# Altium PCB PCB1.PcbDoc
Units mm, origin at the board's own origin, x right, y up, seen from the top; angles counter-clockwise.
Board outline 32.85 x 43.15 mm, 2 copper layers (Top Layer, Bottom Layer); 20 components, 17 nets, 51 pads, 0 vias.
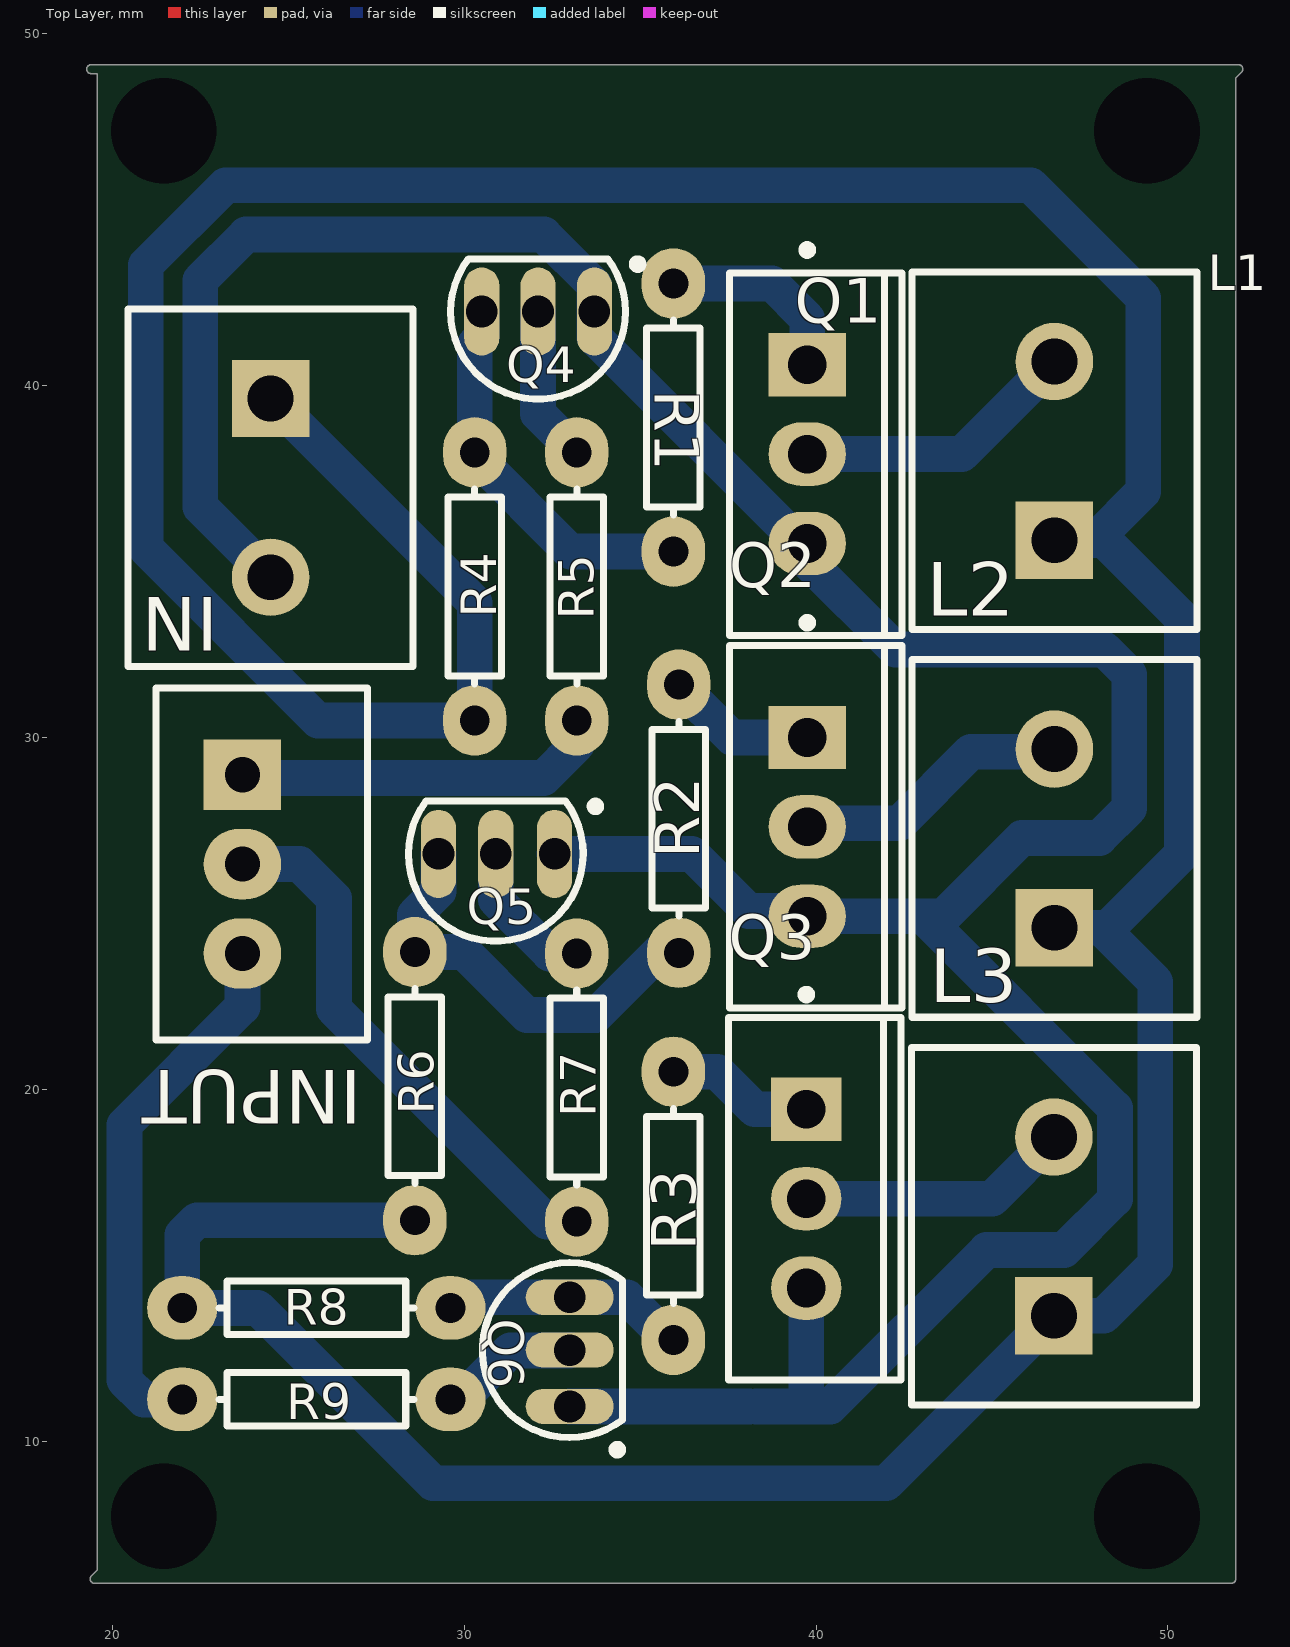
[diagram p0: Top Layer view]
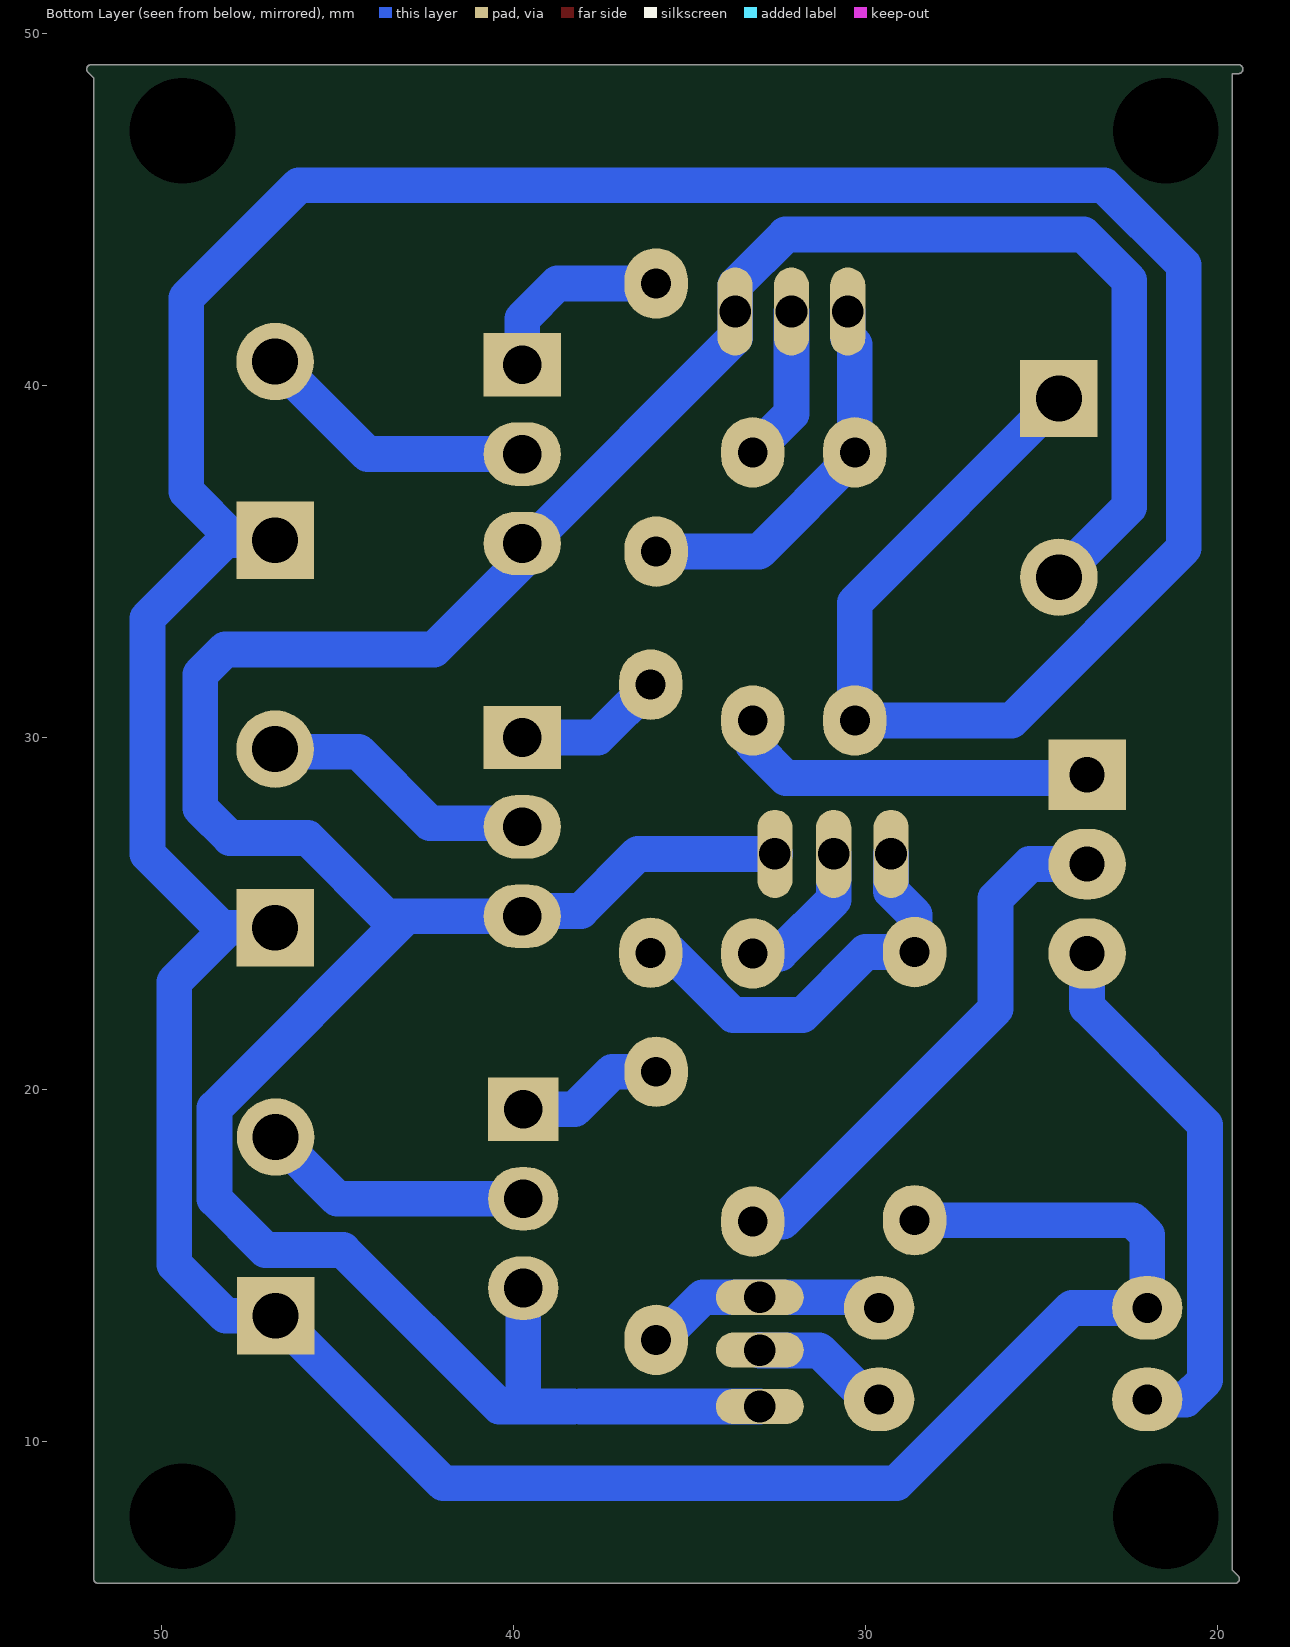
[diagram p1: Bottom Layer view, seen from below]

## Layer stack, top to bottom
Top Solder: solder mask 0.0102, Solder Resist, Dk 3.5
Top Layer: signal copper 0.0356
Dielectric 1: dielectric 0.32, FR-4, Dk 4.8
Bottom Layer: signal copper 0.0356
Bottom Solder: solder mask 0.0102, Solder Resist, Dk 3.5

## Board outline
19.41,6.191 ccw(c19.5,6.1) 19.5,5.973 51.8,5.973 ccw(c51.8,6.1) 51.927,6.1 51.927,48.747 52.09,48.91 ccw(c52,49) 52.127,49 ccw(c52,49) 52,49.127 19.4,49.127 ccw(c19.4,49) 19.4,48.873 19.573,48.873 19.573,6.353
cut-out: 142.367,57.912

## Design rules (kind name [scope] priority, off if disabled: settings)
Clearance Clearance_2 [All] p1: gap=0.127 ignorepadtopadclearanceinfootprint=FALSE
Clearance Clearance_1 [All] p2: gap=0.254 ignorepadtopadclearanceinfootprint=FALSE except(0: Arc-Hole Track-Hole SMDPad-Hole THPad-Hole Via-Hole Fill-Hole Poly-Hole Region-Hole Text-Hole)
Clearance [All] p3: gap=0.254 ignorepadtopadclearanceinfootprint=FALSE except(0: Arc-Hole Track-Hole SMDPad-Hole THPad-Hole Via-Hole Fill-Hole Poly-Hole Region-Hole Text-Hole)
DiffPairsRouting [All] p1: maxlimit=0.5 minlimit=0.35 mostfreqgap=0.35 toplayer_minwidth=0.381 toplayer_maxwidth=0.381 toplayer_prefwidth=0.381 bottomlayer_minwidth=0.381 bottomlayer_maxwidth=0.381 bottomlayer_prefwidth=0.381 maxuncoupledlength=12.7
PolygonConnect [All] p1: connectstyle=Relief reliefconductorwidth=0.254 reliefentries=4 polygonreliefangle="90 Angle" airgapwidth=0.254
RoutingVias [All] p1: holewidth=0.711 width=1.27 viastyle="Through Hole" minholewidth=0.711 minwidth=1.27 maxholewidth=0.711 maxwidth=1.27
SolderMaskExpansion [All] p1: expansion=0.102
Width [All] p1: maxlimit=1.27 minlimit=0.508 preferedwidth=1.016
29 further rules are at their usual default settings.

## Components (designator, comment, footprint, x,y, rotation, side; value= is the part's Value field where it differs from the comment)
IN "1729128" PHOE-1729128-2_V 24.5,37.1 r270 top
INPUT "Connector" "1x3x2.54 Pin Header TH V" 23.7,26.411 r270 top
L1 "" PHOE-1729128-2_V 46.773,38.151 r90 top
L2 "1729128" PHOE-1729128-2_V 46.773,27.138 r90 top
L3 "1729128" PHOE-1729128-2_V 46.758,16.115 r90 top
Q1 "TIP31C" ONSC-TO-220-3-221A-09#1 39.748,38.06 r0 top
Q2 "TIP31C" ONSC-TO-220-3-221A-09#1 39.748,27.469 r0 top
Q3 "TIP31C" ONSC-TO-220-3-221A-09#2 39.723,16.902 r0 top
Q4 "2N3904" TO-92A#1 32.1,42.111 r90 top
Q5 "2N3904" TO-92A#2 30.9,26.7 r90 top
Q6 "2N3904" TO-92A#3 33,12.6 r0 top
R1 "Res1" AXIAL-0.3 35.946,39.1 r90 top value=1K
R2 "Res1" AXIAL-0.3 36.1,27.7 r90 top value=1K
R3 "Res1" AXIAL-0.3 35.946,16.7 r90 top value=1K
R4 "Res1" AXIAL-0.3 30.3,34.3 r270 top value=1K
R5 "Res1" AXIAL-0.3 33.2,34.3 r90 top value=10K
R6 "Res1" AXIAL-0.3 28.6,20.1 r270 top value=1K
R7 "Res1" AXIAL-0.3 33.2,20.061 r90 top value=10K
R8 "Res1" AXIAL-0.3 25.8,13.8 r180 top value=1K
R9 "Res1" AXIAL-0.3 25.8,11.2 r0 top value=10K

## Footprints (in the part's own frame and the unit in brackets; to place one, negate y for a bottom-side part, rotate by r counter-clockwise, add the part's x,y. Pads: shape width x height; smd on the part's side, far side on the other; paste and mask are expansions set on the pad)
"1x3x2.54 Pin Header TH V" [mm] "1x3x2.54 Pin Header TH V"
  rect 2x2.2 hole 1: 1(-2.54,0)
  oval 2x2.2 hole 1: 2(0,0) 3(2.54,0)
  silkscreen extent -5,-2.45 5,3.55, body extent -3.81,-1.27 3.81,1.27, height 8.55
AXIAL-0.3 [mm] "Axial Device, Thru-Hole; 2 Leads; 0.3 in Pin Spacing"
  oval 2x1.8 hole 0.85: 1(-3.81,0) 2(3.81,0)
  silkscreen extent -2.77,-0.76 2.77,0.76
ONSC-TO-220-3-221A-09#1 [mm] "FM, 3-Leads, Body 10.3x4.85mm, Pitch 2.54mm"
  rect 2.2x1.8 hole 1.1: 1(0,2.54)
  oval 2.2x1.8 hole 1.1: 2(0,0) 3(0,-2.54)
  silkscreen extent -2.2,-5.15 2.69,5.92, body extent -2.18,-5.15 2.67,5.15, height 19.85
ONSC-TO-220-3-221A-09#2 [mm] "FM, 3-Leads, Body 10.3x4.85mm, Pitch 2.54mm"
  rect 2x1.8 hole 1.1: 1(0,2.54)
  oval 2x1.8 hole 1.1: 2(0,0) 3(0,-2.54)
  silkscreen extent -2.2,-5.15 2.69,5.92, body extent -2.18,-5.15 2.67,5.15, height 19.85
PHOE-1729128-2_V [mm] "Receptacle, 2-Leads, Body 8.1x10.16mm, Pitch 5.08mm"
  rect 2.2x2.2 hole 1.3: 1(-2.54,0)
  round 2.2 hole 1.3: 2(2.54,0)
  silkscreen extent -5.08,-4.05 5.08,4.05, body extent -5.65,-4.05 5.08,4.05, height 10.01
TO-92A#1 [mm] "TO, Flat Index; 3 In-Line, Axial Leads; Body Dia. 4.5mm; Leads 0.51 x 0.48 mm (max)"
  oval 2.5x1 hole 0.9: 1(0,-1.6) 2(0,0) 3(0,1.6)
  silkscreen extent -2.48,-2.96 1.5,2.48, body extent -2.48,-2.5 1.5,2.5, height 6.86
TO-92A#2 [mm] "TO, Flat Index; 3 In-Line, Axial Leads; Body Dia. 4.5mm; Leads 0.51 x 0.48 mm (max)"
  oval 2.5x1 hole 0.9: 1(0,-1.67) 2(0,0) 3(0,1.63)
  silkscreen extent -2.48,-2.96 1.5,2.48, body extent -2.48,-2.5 1.5,2.5, height 6.86
TO-92A#3 [mm] "TO, Flat Index; 3 In-Line, Axial Leads; Body Dia. 4.5mm; Leads 0.51 x 0.48 mm (max)"
  oval 2.5x1 hole 0.9: 1(0,-1.6) 2(0,0) 3(0,1.5)
  silkscreen extent -2.48,-2.95 1.5,2.48, body extent -2.48,-2.5 1.5,2.5, height 6.86

## Part data
IN L2 L3: library part CMP-2000-05815-1, "PCB Terminal Block, 13.5 A, 400 V, 2-Pin THD, RoHS, Bulk", Current Rating=13500mA, Manufacturer="Phoenix Contact", Package Description="2-Pin Through Hole Device, Body 8.1 x 10.16 mm, Pitch 5.08 mm", Package Reference=1729128-2, Package Version=03/2015, Voltage Rating=400V, Datasheet URL=https://datasheet.ciiva.com/16046/1729128-16046181.pdf, Datasheet Version=12/2013, Manufacturer URL=http://www.phoenixcontact.com/, Mounting Technology=ThroughHole, No. of Positions=2, No. of Rows=1, Orientation=Horizontal, Package URL=https://www.phoenixcontact.com/online/portal/pi/pxc/product_detail_page/!ut/p/b1/3VdJjqNKFDxLH8AFycySyWY2ozFsEPOMMQaDOX1XedGL_1Vdm5YXJleknhSKeBkvI6EA8ncAo3AYoDhBQGco6KN7VURTdemj9us_IEKEZo_YHiPAEWEFmDGOHMORkqKYCORBZxgL7ZoaZYcbFFUZ3fqxSY6GOuxydWUuHqz1ynmMFygu583Bob0Ewr6Sd_l-5m-kAueHiB0jpRwZwe58wwtkpxtMYd_LmGcDRU02dRNEyWt6Y2ti5pSyJ_reIkzIulrqApdnbT11V5jnCKbYNCvhEM1MCpPByat_X379-iThf08CI5GfOPqfBeS3BRoBOdD55AKVv0iLwCMq-2BrzXWSGRH7pUGD9uwXQjiph3xL0DKQwdGa0JImiIOmBNOestqgwTHSSs2oOep-78apyXQBvNi8ZLaFjvjWvcaUEBu0MC6Wbe-d6mB0FAebo2lUWinqYaZs5DAYzV0RP9yitUjnGJ0iI9xhZkT42OCQNUJJhkgWINNQLP2JFP6OpMg3JCVg70jqHT0lvKOnhHf0lPuOnnLf0VPuWx6_dxwUIvwk5WMkT0kLL1mh61l2yZVSzG3pYV_bqo-mj6uMKwKwdnnW8Jh5RTOJzMOA5c-eJDaZQw4mTMPH02PvS_ZAqNVjVTo2WyYLkwH_KU1mmmG5kjRhDqPXLwwVHvVOjCM60-fpXvTDfMGW1PVFVS1r4e4yVDk4ZdNbkUHvqPqQSeian4UD39fNKmachqdJ1NJbyk8rXT9mXTvPk3oE5meulKGgiruPJek-4I9hTT6G8ZLOyRSm2RRVbThERQad5OS28hdt4YW4vG0stgYYzsWsK4_7y6DZMjJSCqri1kyiZR5vD7pwIrNR7QwPHTcLTI5qT7eRlpHrdGiupYlqQDJ7zy_CND8fWWBoLRXxk1RVcXiBQwbTD4Xi7KL-FuO94t9xaqweXzH, Packing=Bulk, PartNumber=1729128, Pitch=5.08mm, RoHS=TRUE
INPUT: library part "Header 1x3"
L1: library part CMP-2000-05815-1, "PCB Terminal Block, 13.5 A, 400 V, 2-Pin THD, RoHS, Bulk", Current Rating=13500mA, Manufacturer="Phoenix Contact", Package Description="2-Pin Through Hole Device, Body 8.1 x 10.16 mm, Pitch 5.08 mm", Package Reference=1729128-2, Package Version=03/2015, PartNumber=1729128, Voltage Rating=400V, Datasheet URL=https://datasheet.ciiva.com/16046/1729128-16046181.pdf, Datasheet Version=12/2013, Manufacturer URL=http://www.phoenixcontact.com/, Mounting Technology=ThroughHole, No. of Positions=2, No. of Rows=1, Orientation=Horizontal, Package URL=https://www.phoenixcontact.com/online/portal/pi/pxc/product_detail_page/!ut/p/b1/3VdJjqNKFDxLH8AFycySyWY2ozFsEPOMMQaDOX1XedGL_1Vdm5YXJleknhSKeBkvI6EA8ncAo3AYoDhBQGco6KN7VURTdemj9us_IEKEZo_YHiPAEWEFmDGOHMORkqKYCORBZxgL7ZoaZYcbFFUZ3fqxSY6GOuxydWUuHqz1ynmMFygu583Bob0Ewr6Sd_l-5m-kAueHiB0jpRwZwe58wwtkpxtMYd_LmGcDRU02dRNEyWt6Y2ti5pSyJ_reIkzIulrqApdnbT11V5jnCKbYNCvhEM1MCpPByat_X379-iThf08CI5GfOPqfBeS3BRoBOdD55AKVv0iLwCMq-2BrzXWSGRH7pUGD9uwXQjiph3xL0DKQwdGa0JImiIOmBNOestqgwTHSSs2oOep-78apyXQBvNi8ZLaFjvjWvcaUEBu0MC6Wbe-d6mB0FAebo2lUWinqYaZs5DAYzV0RP9yitUjnGJ0iI9xhZkT42OCQNUJJhkgWINNQLP2JFP6OpMg3JCVg70jqHT0lvKOnhHf0lPuOnnLf0VPuWx6_dxwUIvwk5WMkT0kLL1mh61l2yZVSzG3pYV_bqo-mj6uMKwKwdnnW8Jh5RTOJzMOA5c-eJDaZQw4mTMPH02PvS_ZAqNVjVTo2WyYLkwH_KU1mmmG5kjRhDqPXLwwVHvVOjCM60-fpXvTDfMGW1PVFVS1r4e4yVDk4ZdNbkUHvqPqQSeian4UD39fNKmachqdJ1NJbyk8rXT9mXTvPk3oE5meulKGgiruPJek-4I9hTT6G8ZLOyRSm2RRVbThERQad5OS28hdt4YW4vG0stgYYzsWsK4_7y6DZMjJSCqri1kyiZR5vD7pwIrNR7QwPHTcLTI5qT7eRlpHrdGiupYlqQDJ7zy_CND8fWWBoLRXxk1RVcXiBQwbTD4Xi7KL-FuO94t9xaqweXzH, Packing=Bulk, Pitch=5.08mm, RoHS=TRUE
Q1 Q2 Q3: library part CMP-1048-00031-1, "Complementary Silicon Plastic Power Transistor, 3-Pin TO-220, Tube", Manufacturer="On Semiconductor", ComponentLink1Description="Manufacturer URL", ComponentLink1URL=http://www.onsemi.com/, ComponentLink2Description=Datasheet, ComponentLink2URL=http://www.onsemi.com/pub_link/Collateral/TIP31A-D.PDF, ComponentLink3Description="Package Specification", ComponentLink3URL=http://www.onsemi.com/pub_link/Collateral/221A-09.PDF, DatasheetVersion="Rev. 14", fT Min (MHz)=3, IC Continuous (A)=3, Mounting Technology="Through Hole", PackageDescription="3-Pin Flange Mount, Vertical Straight Lead, Body 9.97 x 4.445 mm, Pitch 2.54 mm", PackageReference=TO-220-3-221A-09, PackageVersion="Rev. AG, 09/2011", Packing=Tube, PartNumber=TIP31C, Polarity=NPN, RoHS=FALSE
Q4 Q5 Q6: "NPN General Purpose Amplifier", ComponentLink1Description="Manufacturer Link", ComponentLink1URL=http://www.fairchildsemi.com/, ComponentLink2Description=Datasheet, ComponentLink2URL=http://www.fairchildsemi.com/ds/2N%2F2N3904.pdf, DatasheetVersion=1997, LatestRevisionDate=15-Jan-2003, LatestRevisionNote="PCB Footprint 'BCY-W3/D4.7' replaced", PackageDescription="TO, Flat Index; 3 In-Line, Axial Leads; Body Dia. 4.5mm; Leads 0.51 x 0.48 mm (max)", PackageReference=TO-92A, PackageVersion=Sep-1998, Published=8-Jun-2000, Publisher="Altium Limited"
R1 R2 R3 R4 R5 R6 R7 R8 R9: "Resistor", LatestRevisionDate=17-Jul-2002, LatestRevisionNote="Re-released for DXP Platform.", PackageDescription="Axial Device, Thru-Hole; 2 Leads; 0.3 in Pin Spacing", PackageReference=AXIAL-0.3, Published=8-Jun-2000, Publisher="Altium Limited"

## Free pads (board coordinates)
  round 2.007 hole 3: 3(21.463,47.244) 4(49.403,47.244) 5(21.463,7.874)
  round 0 hole 3 unplated: 6(49.403,7.874)

## Nets (pads, with @x,y where several pads share a name; then routed paths per layer and width w, separated by ;. In a path a pad name is that pad's centre, name@x,y a point inside that pad or via, vN(x,y) a via of type N, cw(c..) or ccw(c..) an arc to the next point about the centre after c; other vN are vias at no path point)
GND: IN.2 Q1.3 Q2.3 Q3.3 Q4.1 Q5.1 Q6.1 | length 96.1
  Bottom Layer w1.016: IN.2 22.5,36.56 22.5,43 23.8,44.3 32.266,44.3 33.7,42.866 Q4.1 33.7,41.377 39.557,35.52 Q1.3 39.748,35.02 42.256,32.512 48.188,32.512 48.9,31.8 48.9,28 48.053,27.153 45.847,27.153 43.623,24.929 43.042,24.929 ; Q5.1 36.462,26.7 38.083,25.079 39.598,25.079 Q2.3 43.042,24.929 ; Q6.1 38.1,11 ; 38.3,11 39.723,11 ; Q3.3 39.723,11 ; 39.723,11 40.4,11 44.843,15.443 47.043,15.443 48.493,16.893 48.493,19.477 43.042,24.929
NetINPUT_1: INPUT.1 R5.1 | length 10.6
  Bottom Layer w1.016: INPUT.1 23.796,28.855 32.255,28.855 33.2,29.8 R5.1
NetINPUT_2: INPUT.2 R7.1 | length 15.5
  Bottom Layer w1.016: INPUT.2 25.329,26.411 26.3,25.44 26.3,22.3 32.349,16.251 R7.1
NetINPUT_3: INPUT.3 R9.1 | length 15.4
  Bottom Layer w1.016: R9.1 20.893,11.2 20.345,11.747 20.345,18.997 23.7,22.352 INPUT.3
NetL1_2: L1.2 Q1.2 | length 8.1
  Bottom Layer w1.016: Q1.2 44.142,38.06 L1.2
NetL2_2: L2.2 Q2.2 | length 7.9
  Bottom Layer w1.016: Q2.2 39.851,27.572 42.372,27.572 44.4,29.6 46.695,29.6 L2.2
NetL3_2: L3.2 Q3.2 | length 7.8
  Bottom Layer w1.016: Q3.2 45.006,16.902 L3.2
NetQ1_1: Q1.1 R1.2 | length 5.5
  Bottom Layer w1.016: R1.2 38.748,42.91 39.748,41.91 Q1.1
NetQ2_1: Q2.1 R2.2 | length 4.3
  Bottom Layer w1.016: R2.2 37.601,30.009 Q2.1
NetQ3_1: Q3.1 R3.2 | length 4.2
  Bottom Layer w1.016: R3.2 37.19,20.51 38.258,19.442 Q3.1
NetQ4_2: Q4.2 R5.2 | length 4.5
  Bottom Layer w1.016: Q4.2 32.1,39.21 R5.2
NetQ4_3: Q4.3 R1.1 R4.1 | length 11
  Bottom Layer w1.016: Q4.3 30.5,41.377 30.3,41.177 R4.1 30.3,38.01 33.02,35.29 R1.1
NetQ5_2: Q5.2 R7.2 | length 4.2
  Bottom Layer w1.016: Q5.2 30.9,25.398 32.427,23.871 R7.2
NetQ5_3: Q5.3 R2.1 R6.1 | length 12
  Bottom Layer w1.016: Q5.3 29.27,25.638 28.6,24.968 R6.1 29.997,23.91 31.784,22.123 33.757,22.123 35.523,23.89 R2.1
NetQ6_2: Q6.2 R9.2 | length 4
  Bottom Layer w1.016: R9.2 29.922,11.2 31.314,12.592 32.992,12.592 Q6.2
NetQ6_3: Q6.3 R3.1 R8.1 | length 7
  Bottom Layer w1.016: R8.1 29.922,13.8 30.222,14.1 Q6.3 34.624,14.1 35.834,12.89 R3.1
VCC: IN.1 L1.1 L2.1 L3.1 R4.2 R6.2 R8.2 | length 136.1
  Bottom Layer w1.016: IN.1 30.3,33.84 R4.2 25.847,30.49 20.955,35.382 20.955,43.434 23.221,45.7 46.1,45.7 49.3,42.5 49.3,37 47.911,35.611 ; R6.2 22.405,16.29 21.99,15.875 R8.2 24.13,13.8 29.116,8.814 41.997,8.814 L3.1 48.175,13.575 49.636,15.036 49.636,23.064 48.102,24.598 ; L2.1 48.102,24.598 ; L1.1 47.911,35.611 ; 47.911,35.611 48.189,35.611 50.4,33.4 50.4,26.7 48.298,24.598 48.102,24.598

## Dimensions
21.463,47.244 to 49.403,47.244 on Multi-Layer
49.403,7.874 to 21.463,7.874 on Multi-Layer